# Altium PCB 19V_Supply.PcbDoc
Units mm, origin at the board's own origin, x right, y up, seen from the top; angles counter-clockwise.
Board outline 136 x 68 mm, 2 copper layers (Top Layer, Bottom Layer), stack 1.571 mm thick; 76 components, 48 nets, 205 pads, 0 vias.
Unrouted connection lines stored in the file: 1.
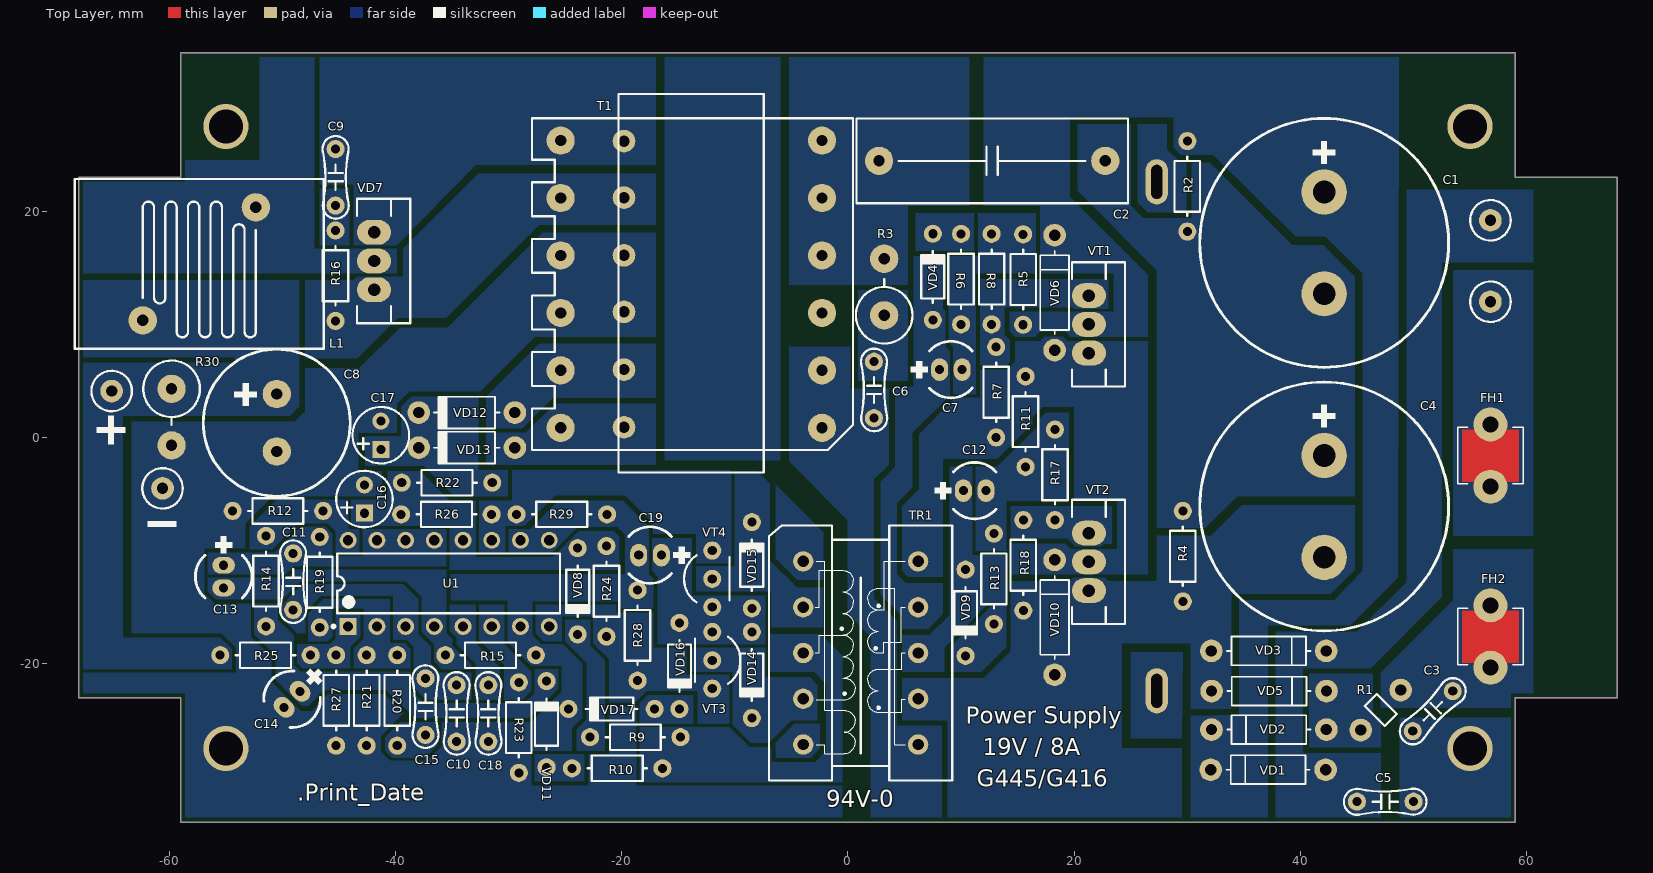
[diagram p0: Top Layer view]
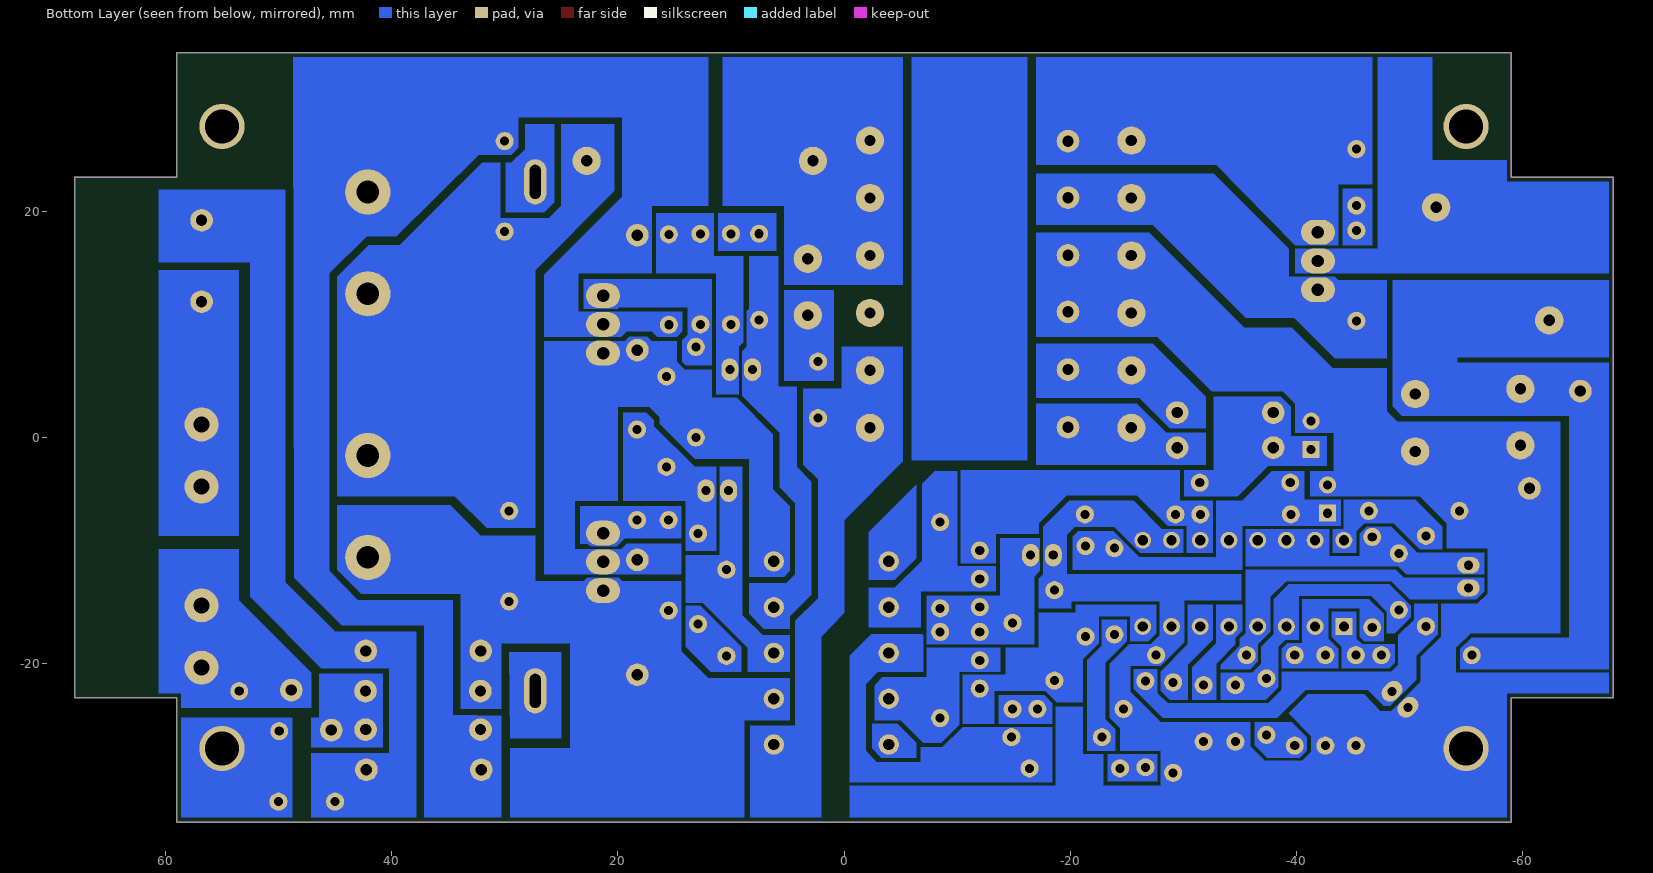
[diagram p1: Bottom Layer view, seen from below]

## Layer stack, top to bottom
Top Solder: solder mask 0.0102, Solder Resist, Dk 3.5
Top Layer: signal copper 0.0356
Dielectric 1: dielectric 1.5, FR-4, Dk 4.8
Bottom Layer: signal copper 0.0356
Bottom Solder: solder mask 0.0102, Solder Resist, Dk 3.5

## Board outline
-68,-23 -68,23 -59,23 -59,34 59,34 59,23 68,23 68,-23 59,-23 59,-34 -59,-34 -59,-23

## Design rules (kind name [scope] priority, off if disabled: settings)
Clearance [All] p1: gap=0.3
Height [All] p1: minheight=0 maxheight=50 prefheight=12.7
HoleSize [All] p1: absolutevalues=TRUE maxlimit=5 minlimit=0.025 maxpercent=80.000 minpercent=20.000
PolygonConnect [All] p1: connectstyle=Relief reliefconductorwidth=0.254 reliefentries=4 polygonreliefangle="90 Angle" airgapwidth=0.254
RoutingVias [All] p1: holewidth=0.711 width=1.27 viastyle="Through Hole" minholewidth=0.711 minwidth=1.27 maxholewidth=0.711 maxwidth=1.27
SilkToSilkClearance [All] p1: silktosilkclearance=0
SolderMaskExpansion [All] p1: expansion=0.102
Width [All] p1: maxlimit=3 minlimit=0.2 preferedwidth=0.3
26 further rules are at their usual default settings.

## Components (designator, comment, footprint, x,y, rotation, side; value= is the part's Value field where it differs from the comment)
C1 "220uF" CAP_EL_22_25_VERT 42.1,17.2 r90 top
C2 "1uF" CAPRR2000W80L2400T750H1500_CL21 12.75,24.45 r180 top
C3 "1nF" CAP_5.0MM 51.7,-24.2 r45 top
C4 "220uF" CAP_EL_22_25_VERT 42.1,-6.1 r90 top
C5 "1nF" CAP_5.0MM 47.5,-32.2 r0 top
C6 "1nF" CAP_5.0MM 2.3,4.2 r90 top
C7 "1uF" CAP_EL_05_11_VERT 9.1,6 r180 top
C8 "1000uF" CAP_EL_13_20_VERT -50.5,1.3 r90 top
C9 "1nF" CAP_5.0MM -45.3,23 r90 top
C10 "10nF" CAP_5.0MM -34.6,-24.4 r90 top
C11 "10nF" CAP_5.0MM -49.05,-12.75 r270 top
C12 "1uF" CAP_EL_05_11_VERT 11.2,-4.7 r180 top
C13 "10uF" CAP_EL_05_11_VERT -55.2,-12.3 r90 top
C14 "1uF" CAP_EL_05_11_VERT -49.15,-23.15 r45 top
C15 "10nF" CAP_5.0MM -37.35,-23.8 r270 top
C16 "47uF" CAPPR250-500X1100 -42.75,-5.45 r90 top
C17 "47uF" CAPPR250-500X1100 -41.3,0.2 r90 top
C18 "1nF" CAP_5.0MM -31.8,-24.4 r90 top
C19 "1uF" CAP_EL_05_11_VERT -17.5,-10.4 r0 top
FH1 "ZH266" ZH266 56.8,-1.6 r90 top
FH2 "ZH266" ZH266 56.8,-17.6 r270 top
L1 "7.5uH" DGS -57.35,15.35 r180 top
R1 "10R" B57164K 47.1,-24.1 r225 top
R2 "150k" RES_AXIAL_0_25_8 30,22.2 r90 top
R3 "100" RES_VERT_2W_5 3.2,10.8 r270 top
R4 "150k" RES_AXIAL_0_25_8 29.6,-10.5 r90 top
R5 "220k" RES_AXIAL_0_25_8 15.491,13.962 r270 top
R6 "39" RES_AXIAL_0_25_8 10,14 r270 top
R7 "2k7" RES_AXIAL_0_25_8 13.1,4 r90 top
R8 "2R2" RES_AXIAL_0_25_8 12.7,14 r270 top
R9 "1k5" RES_AXIAL_0_25_8 -18.8,-26.5 r180 top
R10 "1k5" RES_AXIAL_0_25_8 -20.4,-29.25 r0 top
R11 "220k" RES_AXIAL_0_25_8 15.7,1.4 r90 top
R12 "4k7" RES_AXIAL_0_25_8 -50.4,-6.5 r0 top
R13 "39" RES_AXIAL_0_25_8 12.9,-12.5 r90 top
R14 "22k" RES_AXIAL_0_25_8 -51.45,-12.7 r90 top
R15 "12k" RES_AXIAL_0_25_8 -31.6,-19.25 r180 top
R16 "15" RES_AXIAL_0_25_8 -45.3,14.3 r270 top
R17 "2R2" RES_AXIAL_0_25_8 18.3,-3.3 r270 top
R18 "2k7" RES_AXIAL_0_25_8 15.5,-11.3 r90 top
R19 "4k7" RES_AXIAL_0_25_8 -46.7,-12.8 r270 top
R20 "33k" RES_AXIAL_0_25_8 -39.85,-23.25 r90 top
R21 "4k7" RES_AXIAL_0_25_8 -42.55,-23.25 r270 top
R22 "22" RES_AXIAL_0_25_8 -35.45,-4 r0 top
R23 "16k" RES_AXIAL_0_25_8 -29.1,-25.65 r90 top
R24 "3k9" RES_AXIAL_0_25_8 -21.35,-13.6 r90 top
R25 "30k" RES_AXIAL_0_25_8 -51.5,-19.25 r180 top
R26 "3k9" RES_AXIAL_0_25_8 -35.5,-6.8 r180 top
R27 "4k7" RES_AXIAL_0_25_8 -45.25,-23.25 r90 top
R28 "1k5" RES_AXIAL_0_25_8 -18.6,-17.5 r270 top
R29 "1k5" RES_AXIAL_0_25_8 -25.3,-6.8 r180 top
R30 "1k" RES_VERT_2W_5 -59.8,4.3 r90 top
T1 "ETD34_2" ETD34_2 -13.85,13.55 r180 top
TR1 "TM1904" TM1904 6.2,-27.15 r180 top
U1 "TL494IN" DIP16 -35.3,-12.9 r90 top
VD1 "1N4007" DO-41 37.15,-29.25 r0 top
VD2 "1N4007" DO-41 37.215,-25.701 r0 top
VD3 "1N4007" DO-41 37.2,-19 r180 top
VD4 "1N4148" DO-35(300mil) 7.5,14.2 r270 top
VD5 "1N4007" DO-41 37.227,-22.549 r180 top
VD6 "FR107" DO-41 18.4,12.8 r270 top
VD7 "MBR20150CT" TO-220-3 -41.9,15.6 r270 top
VD8 "1N4148" DO-35(300mil) -23.9,-13.6 r90 top
VD9 "1N4148" DO-35(300mil) 10.4,-15.5 r90 top
VD10 "FR107" DO-41 18.4,-15.9 r270 top
VD11 "1N4148" DO-35(300mil) -26.65,-25.35 r270 top
VD12 "FR107" "DO-41 (8.5MM)" -33.7,2.2 r0 top
VD13 "FR107" "DO-41 (8.5MM)" -33.7,-0.9 r0 top
VD14 "1N4148" DO-35(300mil) -8.5,-21 r90 top
VD15 "1N4148" DO-35(300mil) -8.5,-11.3 r270 top
VD16 "1N4148" DO-35(300mil) -14.9,-20.2 r90 top
VD17 "1N4148" DO-35(300mil) -20.9,-24 r0 top
VT1 "ST13007" TO-220-3 21.3,10 r270 top
VT2 "ST13007" TO-220-3 21.3,-11 r270 top
VT3 "2SC945" TO92 -12,-19.7 r90 top
VT4 "2SC945" TO92 -12,-12.5 r270 top

## Footprints (in the part's own frame and the unit in brackets; to place one, negate y for a bottom-side part, rotate by r counter-clockwise, add the part's x,y. Pads: shape width x height; smd on the part's side, far side on the other; paste and mask are expansions set on the pad)
B57164K [mm]
  round 2 hole 1: 1(-2.5,0) 2(2.5,0)
  silkscreen extent -0.75,-1.25 0.75,1.25, body extent -4,-1.25 4,1.26, height 10.5
CAP_5.0MM [mm]
  round 1.6 hole 0.8: 1(-2.5,0) 2(2.5,0)
  silkscreen extent -3.65,-1.16 3.65,1.15, body extent -2.8,-1.25 2.8,1.25, height 6.5
CAP_EL_05_11_VERT [mm]
  oval 1.5x2 hole 0.8: 1(1,0) 2(-1,0)
  silkscreen extent -1.88,-2.5 3.55,2.5, body extent -2.5,-2.5 2.5,2.5, height 11.31
CAP_EL_13_20_VERT [mm]
  round 2.5 hole 1: 1(2.54,0) 2(-2.54,0)
  silkscreen extent -6.5,-6.5 6.5,6.5, body extent -6.49,-6.48 6.5,6.48, height 20.72
CAP_EL_22_25_VERT [mm]
  round 4 hole 2: 1(4.5,0) 2(-4.5,0)
  silkscreen extent -11,-11 11,11, body extent -11,-11 11,11, height 25.01
CAPPR250-500X1100 [mm] "Capacitor, Radial, Pin spacing 2.5mm - Body Diameter 5.0mm X Body Height 11mm"
  rect 1.5x1.5 hole 0.8: 1(-1.25,0)
  round 1.5 hole 0.8: 2(1.25,0)
  silkscreen extent -2.5,-2.5 2.5,2.5, body extent -2.51,-2.51 2.49,2.49, height 10.9
CAPRR2000W80L2400T750H1500_CL21 [mm]
  round 2.5 hole 1: 1(-10,0) 2(10,0)
  silkscreen extent -12,-3.75 12,3.75, body extent -12,-3.75 12,3.75, height 15.25
DGS [mm]
  round 2.5 hole 1: 1(-5,-5) 2(5,5)
  silkscreen extent -11,-7.5 11,7.5
DIP16 [mm] "DIP, 16-Leads, Row Spacing 7.62mm, Pitch 2.54mm, Body 19.3x6.4mm"
  rect 1.5x1.5 hole 0.9: 1(-3.81,8.89)
  round 1.5 hole 0.9: 2(-3.81,6.35) 3(-3.81,3.81) 4(-3.81,1.27) 5(-3.81,-1.27) 6(-3.81,-3.81) 7(-3.81,-6.35) 8(-3.81,-8.89) 9(3.81,-8.89) 10(3.81,-6.35) 11(3.81,-3.81) 12(3.81,-1.27) 13(3.81,1.27) 14(3.81,3.81) 15(3.81,6.35) 16(3.81,8.89)
  silkscreen extent -3.93,-9.85 2.65,10.31, body extent -3.91,-9.71 3.91,9.72, height 4.67
DO-35(300mil) [mm]
  round 1.6 hole 0.8: A(3.81,0) K(-3.81,0)
  silkscreen extent -2.28,-1.03 2.28,1.02, body extent -4.07,-1.01 4.07,1.01, height 2.21
DO-41 [mm] "Diode, thru-hole"
  round 2 hole 1: A(5.08,-0.127) K(-5.08,-0.127)
  silkscreen extent -3.68,-1.4 3.68,1.14, body extent -5.46,-1.42 5.46,1.14, height 2.55
"DO-41 (8.5MM)" [mm] "Diode, thru-hole"
  round 2 hole 1: A(4.25,0) K(-4.25,0)
  silkscreen extent -2.9,-1.4 2.9,1.4, body extent -4.68,-1.37 4.68,1.37, height 2.87
ETD34_2 [mm]
  round 2.5 hole 1: 1(-11.557,12.7) 2(-11.557,7.62) 3(-11.557,2.54) 4(-11.557,-2.54) 5(-11.557,-7.62) 6(-11.557,-12.7) 7(11.557,-12.7) 8(11.557,-7.62) 9(11.557,-2.54) 10(11.557,2.54) 11(11.557,7.62) 12(11.557,12.7)
  silkscreen extent -14.3,-16.82 14.08,16.66, body extent -14.25,-16.88 14.25,16.88, height 31
RES_AXIAL_0_25_8 [mm]
  round 1.6 hole 0.8: 1(-4,0) 2(4,0)
  silkscreen extent -2.63,-1.12 2.63,1.12, body extent -4.3,-1.2 4.3,1.2, height 2.7
RES_VERT_2W_5 [mm]
  round 2.5 hole 1: 1(-5,0) 2(0,0)
  silkscreen extent -3.18,-2.5 2.5,2.5, body extent -5.4,-2.51 2.5,2.51, height 21.3
TM1904 [mm]
  round 1.8 hole 1 mask-0.036: 1(10.16,-16.192) 2(10.16,-12.144) 3(10.16,-8.096) 4(10.16,-4.048) 5(10.16,0) 6(0,0) 7(0,-4.048) 8(0,-8.096) 9(0,-12.144) 10(0,-16.192)
  silkscreen extent -3.02,-19.37 13.18,3.18
TO92 [mm]
  round 1.6 hole 0.8: 1(-2.5,0) 2(0,0) 3(2.5,0)
  silkscreen extent -2.08,-2.5 2.08,1.52, body extent -2.76,-2.53 2.77,1.55, height 6.7
TO-220-3 [mm]
  oval 2.2x3 hole 1.1: 1(-2.54,0) 2(0,0) 3(2.54,0)
  silkscreen extent -5.5,-1.5 5.5,3.2, body extent -5.61,-1.5 5.61,3.19, height 19.33
ZH266 [mm]
  round 3 hole 1.4: 1(-2.75,0) 1(2.75,0)
  Top Layer pour cut-out: -3.05,2.9 -3.05,-2.9 3.05,-2.9 3.05,2.9
  Top Layer region: -2.3,2.5 -2.3,-2.5 2.3,-2.5 2.3,2.5
  Bottom Layer region: -2.75,1.5 2.75,1.5 2.75,-1.5 -2.75,-1.5
  silkscreen extent -2.5,-2.9 2.5,2.9, body extent -3.05,-2.9 3.05,2.9, height 8.28

## Part data
C1 C4: library part "LG200M0220BPF-2225 (VERT MOUNTED)"
C2: library part "К73-17-250-1 10%", "SMD 0805 Capacitor"
C3 C5 C6 C9: library part CK45-B3DD102KYNN, "SMD 0805 Capacitor"
C7 C12 C14 C19: library part "SH050M1R00B2F-0511 (VERT MOUNTED)"
C8: library part "SK035M1000B5S-1320 (VERT MOUNTED)"
C10 C11 C15: library part TS170R1H103K8BBB0R, "SMD 0805 Capacitor"
C13: library part "SH050M0010B2F-0511 (VERT MOUNTED)"
C16 C17: library part CAER_47UF_25V_20%_250-500X1100, "Polarised capacitor"
C18: library part TS170R1H102JSBNB0R, "SMD 0805 Capacitor"
L1: library part DGS
R1: library part B57164K
R2 R4: library part RMF_150K_1%_0.6W_50PPM_1016-630X250
R3 R30: library part RCF_100R_5%_2W_HB
R5 R11: library part RMF_220K_1%_0.6W_50PPM_1016-630X250
R6 R13: library part RMF_39R_1%_0.6W_50PPM_1016-630X250
R7 R18: library part RMF_2K7_1%_0.6W_50PPM_1016-630X250
R8 R17: library part RMF_2R2_1%_0.6W_50PPM_1016-630X250
R9 R10 R28 R29: library part RMF_1K5_1%_0.6W_50PPM_1016-630X250
R12 R19 R21 R27: library part RMF_4K7_1%_0.6W_50PPM_1016-630X250
R14: library part RMF_22K_1%_0.6W_50PPM_1016-630X250
R15: library part RMF_12K_1%_0.6W_50PPM_1016-630X250
R16: library part RMF_15R_1%_0.6W_50PPM_1016-630X250
R20: library part RMF_33K_1%_0.6W_50PPM_1016-630X250
R22: library part RMF_22R_1%_0.6W_50PPM_1016-630X250
R23: library part RMF_16K_1%_0.6W_50PPM_1016-630X250
R24 R26: library part RMF_3K9_1%_0.6W_50PPM_1016-630X250
R25: library part RMF_30K_1%_0.6W_50PPM_1016-630X250
T1: library part ETD34/2
VD1 VD2 VD3 VD5: library part 1N4007_HOR
VD4 VD8 VD9 VD11 VD14 VD15 VD16 VD17: library part "1N4148 (300mil)"
VD6 VD10 VD12 VD13: library part "FR107 (HOR MOUNTED)"

## Free pads (board coordinates)
  round 4 hole 3: 0(-55,-27.5) 0(-55,27.5) 0(55,-27.5) 0(55,27.5)
  round 2 hole 1: 0(-19.8,26.2) 1(-19.8,21.2) 2(-19.8,16.1) 3(-19.8,11.1) 4(-19.8,6) 5(-19.8,0.9) 6(-60.6,-4.5) 7(-65.1,4.1) 8(56.8,19.2) 9(56.8,12)
  oval 2x4 hole 1 slot 3 at 90 deg unplated: 0(27.3,22.6) 1(27.3,-22.4)

## Nets (pads, with @x,y where several pads share a name; then routed paths per layer and width w, separated by ;. In a path a pad name is that pad's centre, name@x,y a point inside that pad or via, vN(x,y) a via of type N, cw(c..) or ccw(c..) an arc to the next point about the centre after c; other vN are vias at no path point)
1IN+: R25.1 R27.2 U1.1
+24V: C8.1 L1.2 pad.7 R25.2 R30.2
AC1: FH1.1 pad.9
AC2: C5.1 pad.8 VD1.A VD3.K
GND: C3.1 C5.2 C8.2 C10.1 C14.2 C16.2 C17.2 C18.1 C19.2 pad.0@55,-27.5 pad.0@-55,-27.5 pad.2 pad.3 pad.6 R12.1 R15.1 R21.2 R23.1 R27.1 R28.1 R29.1 R30.1 T1.9 T1.10 U1.7 U1.9 U1.10 VD17.K
NetC1_1: C1.1 R2.2 R5.2 VD1.K VD2.K VD6.K VT1.2
NetC1_2: C1.2 C2.1 C4.1 R2.1 R4.2
NetC2_2: C2.2 R3.1 T1.4 T1.5 T1.6
NetC3_2: C3.2 FH2.1 R1.1
NetC4_2: C4.2 R4.1 R18.1 TR1.7 VD3.A VD5.A VD10.A VT2.3
NetC6_1: C6.1 T1.1 T1.2 TR1.6
NetC6_2: C6.2 R3.2
NetC7_1: C7.1 TR1.9 VD4.A
NetC7_2: C7.2 R5.1 R6.2 R8.1 | length 0.1
  Bottom Layer w1: R5.1@15.453,18 R5.1
NetC9_1: C9.1 R16.1
NetC9_2: C9.2 pad.0@-19.8,26.2 T1.7 VD7.1
NetC10_2: C10.2 C11.2 C15.1 U1.3
NetC11_1: C11.1 C13.1 R19.1 U1.13 U1.14 U1.15
NetC12_1: C12.1 TR1.8 VD9.A
NetC12_2: C12.2 R11.1 R13.2 R17.1
NetC13_2: C13.2 R15.2 U1.4
NetC14_1: C14.1 R14.1 VD11.K
NetC15_2: C15.2 R20.1
NetC17_1: C17.1 R22.2 VD12.K VD13.K
NetC18_2: C18.2 U1.5
NetC19_1: C19.1 VD14.A VD15.A VD16.A VT3.3 VT4.3
NetL1_1: L1.1 VD7.2
NetR1_2: R1.2 VD2.A VD5.K
NetR6_1: R6.1 VD4.K
NetR7_1: R7.1 R11.2 TR1.10 VD6.A VD10.K VT1.3 VT2.2
NetR7_2: R7.2 R8.2 VT1.1
NetR9_1: R9.1 R10.2 TR1.3
NetR9_2: R9.2 VD8.K
NetR10_1: R10.1 VD11.A
NetR12_2: R12.2 R14.2 U1.16
NetR13_1: R13.1 VD9.K
NetR16_2: pad.1@-19.8,21.2 R16.2 T1.8 VD7.3
NetR17_2: R17.2 R18.2 VT2.1
NetR19_2: R19.2 R20.2 R21.1 U1.2
NetR23_2: R23.2 U1.6
NetR24_1: R24.1 R28.2 U1.8 VT3.1
NetR26_1: R26.1 R29.2 U1.11 VT4.1
NetT1_11: pad.4 T1.11 VD12.A
NetT1_12: pad.5 T1.12 VD13.A
NetTR1_2: TR1.2 VD15.K VT4.2
NetTR1_4: TR1.4 VD14.K VT3.2
NetVD16_K: VD16.K VD17.A
TL_VCC: C16.1 R22.1 R24.2 R26.2 U1.12 VD8.A
pads on no net: T1.3 TR1.1 TR1.5

## Keep-outs
Keep-Out Layer:
  the board outline again, w0.075

## Other copper
Bottom Layer:
  region net NetR6_1: 11.1,19.8 11.1,16.5 6,16.5 6,19.8
  region net NetC7_2: 16.6,19.8 11.5,19.8 11.5,16 8.9,16 8.9,8.4 9.3,8 9.3,3.8 11.3,3.8 11.3,14.5 16.6,14.5
  region net NetR7_2: 23,14 11.7,14 11.7,6.4 14,6.4 14.3,6.7 14.3,8.6 13.8,9.1 13.8,11.5 19.9,11.5 20,11.4 23,11.4
  region: -16.2,33.6 -6,33.6 -6,-2 -16.2,-2
  region: -6.4,-10.7 -4.5,-12.6 -2.2,-12.6 -2.2,-8.4 -6.4,-4.2
  region net NetC9_1: -46.7,22 -46.7,17 -44.1,17 -44.1,22
  region: 25,-19 29.6,-19 29.5,-26.6 25,-26.6
  region: 25.6,27.7 25.6,20.8 26.5,19.9 29.9,19.9 29.9,24.3 29.4,24.3 28.2,25.5 28.2,27.7
  region: -4.7,-25.3 -6.4,-27 -6.4,-28.3 -3.3,-28.3 -2.5,-27.5 -2.5,-25.3
  region net NetR17_2: 23.3,-6.1 14.4,-6.1 14.4,-8.9 19.4,-8.9 20.1,-9.6 22.4,-9.6 22.7,-9.4 23.3,-9.4
  region net AC1: 53.5,14.8 53.5,-8.7 60.6,-8.7 60.6,14.8
  region net NetR1_2: 40.8,-27.4 47.1,-27.4 47.1,-24.8 46.4,-24.8 46.4,-20.9 40.8,-20.9
  region net NetC3_2: 60.6,-9.9 53.5,-9.9 53.5,-14.4 47.1,-20.8 47.1,-23.9 58.6,-23.9 58.6,-22.6 60.6,-22.6
  region net GND: 58.6,-24.8 58.6,-33.6 48.8,-33.6 48.8,-24.8
  region net AC2: 45,-17.2 37.8,-17.2 37.8,-33.6 47.1,-33.6 47.1,-27.9 40.2,-27.9 40.2,-20.4 46.2,-20.4 52.5,-14.1 52.5,15.5 60.6,15.5 60.6,21.9 49.4,21.9 49.4,-12.8
  region net NetC1_2: 20.3,21.8 27.3,14.8 27.3,-8 31.6,-8 34.4,-5.2 44.8,-5.2 44.8,14.2 42,17 39.3,17 32,24.3 30.4,24.3 30.4,19.4 26.1,19.4 25,20.5 25,27.7 20.3,27.7
  region net NetC4_2: 4.8,-21.3 12,-21.3 14.4,-18.9 14.4,-12.7 19.6,-12.7 19.9,-12.4 22.7,-12.4 23,-12.7 27.3,-12.7 27.3,-8.7 32.1,-8.7 34.8,-6 44.8,-6 44.8,-11.7 42.7,-13.8 33.9,-13.8 33.9,-24 30.3,-24 30.3,-18.2 24.2,-18.2 24.2,-27.5 29.5,-27.5 29.5,-33.6 8.8,-33.6 8.8,-25 4.8,-25
  region net NetC1_1: 14.3,11.1 14.3,9.4 14.8,8.9 16.5,8.9 17,9.4 19.2,9.4 19.7,8.9 26.5,8.9 26.5,14.4 19.6,21.3 19.6,28.3 28.8,28.3 28.8,25.6 29.4,25 32.3,25 39.6,17.8 42.2,17.8 45.5,14.5 45.5,-11.8 43,-14.4 34.6,-14.4 34.6,-24.5 30.3,-24.6 30.3,-33.6 37.1,-33.6 37.1,-16.6 44.4,-16.6 48.6,-12.4 48.7,33.6 12,33.6 12,20.5 17,20.5 17,14.5 23.5,14.5 23.5,11.1
  region net NetC12_2: 19.5,-5.6 14,-5.6 14,-10 11.3,-10 11.3,-2.6 13.2,-2.6 16.8,1 16.8,1.5 17.5,2.2 19.5,2.2
  region net NetR13_1: 9.1,-20.7 11.8,-20.7 14,-18.5 14,-14.9 12.7,-14.9 9.1,-18.5
  region net NetC12_1: 9,-2.6 9,-15.7 7.2,-17.5 4.8,-17.5 4.8,-20.7 8.5,-20.7 8.5,-18.6 12.5,-14.6 14,-14.6 14,-10.4 11,-10.4 11,-2.6
  region net NetR7_1: 4.8,-11.8 4.8,-6.1 6.3,-4.6 6.3,0.3 9.5,3.5 11.7,3.5 11.7,6 14.1,6 14.8,6.7 14.8,8.5 17,8.5 17.4,8.9 19,8.9 19.4,8.5 26.5,8.5 26.5,-12.1 14.4,-12.1 14.4,-9.4 19.2,-9.4 19.7,-9.9 23.8,-9.9 23.8,-5.6 20,-5.6 20,2.7 17.2,2.7 16.3,1.8 16.3,1.2 13.2,-1.9 8.4,-1.9 8.4,-12.3 5.3,-12.3
  region net NetC7_1: 5.8,4.5 4.2,4.5 4.2,-2.6 2.9,-3.9 2.9,-13.9 4.8,-15.8 4.8,-16.9 7.1,-16.9 8.4,-15.6 8.4,-12.9 5.1,-12.9 4.3,-12.1 4.3,-5.8 5.7,-4.4 5.7,0.4 9,3.7 9,7.6 8.6,8 8.6,11.2 8.4,11.4 8.4,16 5.8,16
  region net NetC2_2: -5.2,33.6 -5.2,13.5 5.3,13.5 5.3,20.5 10.7,20.5 10.7,33.6
  region net NetC6_2: 0.9,13 0.9,5 5.3,5 5.3,13
  region net NetC6_1: -5.2,-2.1 0,-7.3 0,-15.5 2,-17.6 2,-33.6 8.3,-33.6 8.3,-25.5 4.3,-25.5 4.3,-16.2 2.3,-14.2 2.3,-3.7 3.6,-2.4 3.6,4.3 0.2,4.3 0.2,8 -5.2,8
  region net NetTR1_2: -13.4,-11.4 -13.4,-13.6 -6.8,-13.6 -6.8,-16.8 -2.2,-16.8 -2.2,-13.3 -4.5,-13.3 -6.9,-10.9 -6.9,-4.1 -8,-3 -10,-3 -10,-11.4
  region net NetT1_12: -17,3 -25.9,3 -28.5,0.4 -32,0.4 -32,-2.4 -17,-2.4
  region net NetT1_11: -17,8.3 -27.3,8.3 -32,3.6 -32,0.8 -28.8,0.8 -26.1,3.5 -17,3.5
  region net NetC17_1: -42.7,-2.5 -37.5,-2.5 -34.8,-5.2 -30.1,-5.2 -30.1,-2.9 -32.7,-2.9 -32.7,3.6 -38.6,3.6 -39.5,2.7 -39.5,0.1 -42.7,0.1
  region net NetR26_1: -13.4,-11.1 -10.3,-11.1 -10.3,-2.9 -29.7,-2.9 -29.7,-5.6 -32.6,-5.6 -32.6,-10.2 -30.3,-10.2 -30.3,-7.8 -28.6,-7.8 -25.9,-5.1 -19.7,-5.1 -17.2,-7.6 -17.2,-8.5 -13.4,-8.5
  region net NetC19_1: -16.8,-18.3 -7.3,-18.3 -7.3,-14 -13.8,-14 -13.8,-8.9 -17.3,-8.9 -17.3,-11.8 -16.8,-12.3
  region net NetTR1_4: -13.8,-20.7 -10.2,-20.7 -10.2,-25.4 -8.6,-27 -7,-27 -5,-25 -2.7,-25 -2.7,-21.9 -3.4,-21.2 -7.3,-21.2 -7.3,-18.6 -13.8,-18.6
  region net NetR9_1: -18.4,-25.6 -18.4,-30.5 -0.5,-30.5 -0.5,-19.3 -2.4,-17.4 -6.9,-17.4 -7,-17.5 -7,-20.7 -3,-20.7 -1.9,-21.8 -1.9,-27.7 -2.9,-28.7 -6.8,-28.7 -6.8,-27.4 -8.7,-27.4 -10.5,-25.6
  region net NetVD16_K: -17.7,-22.8 -18.4,-23.5 -18.4,-25.3 -13.7,-25.3 -13.7,-22.8
  region net NetR24_1: -27.6,-14.8 -27.6,-17.3 -26.9,-18 -25.3,-18 -25.3,-15.8 -22.5,-15.8 -22.5,-18.2 -21.1,-19.6 -21.1,-23.4 -18.8,-23.4 -17.8,-22.4 -13.3,-22.4 -13.3,-25.3 -10.5,-25.3 -10.5,-21 -14.3,-21 -14.3,-18.6 -17.2,-18.6 -17.2,-15.5 -20.5,-15.5 -20.5,-14.8
  region net NetR9_2: -25,-18 -23.1,-19.9 -23.1,-24.9 -24,-25.8 -24,-27.7 -21.5,-27.7 -21.5,-19.7 -22.8,-18.4 -22.8,-16.1 -25,-16.1
  region net NetR10_1: -23.3,-30.4 -27.7,-30.4 -27.7,-28 -23.3,-28
  region net NetR23_2: -32.6,-14.8 -32.6,-17.9 -30.4,-20.1 -30.4,-23.2 -28.8,-23.2 -28,-22.4 -28,-20.7 -30.4,-18.3 -30.4,-14.8
  region net NetC18_2: -35.2,-14.8 -35.2,-17.1 -34.6,-17.7 -34.6,-18.3 -32.9,-20 -32.9,-23.2 -30.8,-23.2 -30.8,-20.3 -32.9,-18.2 -32.9,-14.8
  region net NetR12_2: -46,-7.6 -48.6,-7.6 -50.9,-9.9 -52.9,-9.9 -52.9,-7.9 -50.5,-5.5 -44.2,-5.5 -44.2,-8.1 -43.2,-8.1 -43.2,-10.2 -45.3,-10.2 -45.3,-8.3
  region net TL_VCC: -35.2,-7.8 -35.2,-11.7 -20.2,-11.7 -20.2,-8.8 -20.7,-8.3 -23.8,-8.3 -26.1,-10.6 -32.9,-10.6 -32.9,-5.6 -35.2,-5.6 -37.8,-3 -40.7,-3 -40.7,-5.5 -43.9,-5.5 -43.9,-7.8
  region net NetC11_1: -35.5,-11.4 -49,-11.4 -49.7,-12.1 -56.6,-12.1 -56.6,-10.2 -50.7,-10.2 -48.4,-7.9 -46.2,-7.9 -45.6,-8.5 -45.6,-10.5 -42.9,-10.5 -42.9,-8.1 -35.5,-8.1
  region net NetC13_2: -50,-14.3 -48.4,-12.7 -39.1,-12.7 -37.7,-14.1 -37.7,-17.2 -36.6,-18.3 -36.6,-19.8 -35.9,-20.5 -33.3,-20.5 -33.3,-20.1 -35,-18.4 -35,-17.8 -35.5,-17.3 -35.5,-11.7 -48.8,-11.7 -49.5,-12.4 -56.6,-12.4 -56.6,-13.6 -55.9,-14.3
  region net NetC10_2: -46.6,-14 -40.2,-14 -40.2,-17.9 -39,-17.9 -38.4,-18.5 -38.4,-22.1 -37.3,-23.2 -33.3,-23.2 -33.3,-20.8 -36.1,-20.8 -36.9,-20 -36.9,-18.5 -38,-17.4 -38,-14.3 -39.3,-13 -48.2,-13 -50.1,-14.9 -50.1,-15.9 -48.7,-17.3 -48,-17.3 -48,-15.4
  region net NetR19_2: -42.8,-17.8 -43.7,-18.7 -43.7,-20.4 -38.7,-20.4 -38.7,-18.7 -39.2,-18.2 -40.5,-18.2 -40.5,-14.3 -46.4,-14.3 -47.7,-15.6 -47.7,-18 -46,-18 -45.6,-17.6 -45.6,-15.1 -42.8,-15.1
  region net 1IN+: -45.3,-15.4 -45.3,-17.8 -45.8,-18.3 -48.7,-18.3 -48.7,-19.9 -48.2,-20.4 -44,-20.4 -44,-18.5 -43.1,-17.6 -43.1,-15.4
  region net NetC15_2: -39.6,-25.2 -40.9,-26.5 -40.9,-27.7 -40.3,-28.3 -37.4,-28.3 -36.3,-27.2 -36.3,-25.2
  region net NetC14_1: -52.5,-17.4 -50.6,-19.3 -50.6,-21.4 -48.3,-23.7 -47.7,-23.7 -46.3,-22.3 -40.8,-22.3 -38.3,-24.8 -28.2,-24.8 -25.6,-22.2 -25.6,-20.5 -27.7,-20.5 -27.7,-22.62 -28.6,-23.5 -37.5,-23.5 -38.7,-22.3 -38.7,-20.7 -48.4,-20.7 -49,-20.1 -49,-17.5 -50.4,-16.1 -50.4,-14.7 -52.5,-14.7
  region net GND: -52.8,-17.3 -52.8,-17.6 -51,-19.4 -51,-21.6 -48.4,-24.2 -47.4,-24.2 -46,-22.7 -41,-22.7 -39.3,-24.4 -41.3,-26.4 -41.3,-27.8 -40.5,-28.6 -37.2,-28.6 -35.9,-27.3 -35.9,-25.2 -28,-25.2 -25.3,-22.5 -25.3,-20.2 -28,-20.2 -30.1,-18.1 -30.1,-14.4 -35.1,-14.4 -35.1,-12.1 -19.7,-12.1 -19.7,-8.6 -20.4,-7.9 -23.9,-7.9 -26.2,-10.2 -30,-10.2 -30,-8.1 -28.1,-8.1 -25.6,-5.6 -19.9,-5.6 -17.6,-7.9 -17.6,-12.1 -17.2,-12.5 -17.2,-15.1 -20.1,-15.1 -20.1,-14.5 -27.9,-14.5 -27.9,-17.5 -27.1,-18.3 -25.2,-18.3 -23.5,-20 -23.5,-24.8 -24.4,-25.7 -24.4,-27.7 -28,-27.7 -28,-30.8 -22.9,-30.8 -22.9,-28 -21.1,-28 -21.1,-23.8 -18.7,-23.8 -18.7,-30.8 -0.5,-30.8 -0.5,-33.6 -58.6,-33.6 -58.6,-22.6 -67.6,-22.6 -67.6,-20.8 -54.1,-20.8 -54.1,-18.6 -55.4,-17.3
  region net GND: -17,18.1 -27,18.1 -35.4,9.7 -39.6,9.7 -43.2,6.1 -48,6.1 -48,2.3 -48.9,1.4 -63.3,1.4 -63.3,-17.3 -52.8,-17.3 -52.8,-14.7 -56,-14.7 -56.9,-13.8 -56.9,-9.8 -53.3,-9.8 -53.3,-7.6 -50.9,-5.2 -41.2,-5.2 -41.2,-3 -43.3,-3 -43.3,0.4 -39.9,0.4 -39.9,3 -38.8,4.1 -32.5,4.1 -27.7,8.9 -17,8.9
  region net NetR16_2: -17,23.3 -32.7,23.3 -39.3,16.7 -39.3,14.2 -43.4,14.2 -43.7,13.9 -48,13.9 -48,7 -43.4,7 -39.8,10.6 -35.5,10.6 -27.3,18.8 -17,18.8
  region net NetC9_2: -32.9,24.1 -39.9,17 -43.7,17 -43.7,22.4 -46.7,22.4 -46.7,33.6 -17,33.6 -17,24.1
  region net NetL1_1: -67.6,14.5 -67.6,22.6 -58.6,22.6 -58.6,24.5 -52,24.5 -52,33.6 -47.2,33.6 -47.2,16.7 -39.9,16.7 -39.9,14.5
  region net +24V: -64.1,1.9 -64.1,-17.7 -55.5,-17.7 -54.5,-18.7 -54.5,-20.5 -67.6,-20.5 -67.6,6.6 -54.2,6.6 -54.2,7.1 -67.6,7.1 -67.6,13.9 -48.5,13.9 -48.5,2.75 -49.3,1.9

## Silkscreen, mask and mechanical layers (free items; w line width, h text height)
Top Overlay:
  circle w0.2: c56.8,12 r1.789
  circle w0.2: c56.8,19.2 r1.789
  circle w0.2: c-60.6,-4.5 r1.789
  circle w0.2: c-65.1,4.1 r1.789
  region: -60.4,-7.4 -59.4,-7.4 -59.4,-7.9 -61.9,-7.9 -61.9,-7.4
  region: -65.4,1.9 -64.9,1.9 -64.9,0.9 -63.9,0.9 -63.9,0.4 -64.9,0.4 -64.9,-0.6 -65.4,-0.6 -65.4,0.4 -66.4,0.4 -66.4,0.9 -65.4,0.9
  text "Power Supply" at 10.4,-25.3 h1.5
  text "19V / 8A" at 11.9,-28.1 h1.5
  text "G445/G416" at 11.4,-30.9 h1.5
  text ".Print_Date" at -48.7,-32.1 h1.5
  text "94V-0" at -1.9,-32.7 h1.5